# Altium PCB UltraZohm_Digital_Template.PcbDoc
Units mm, origin at the board's own origin, x right, y up, seen from the top; angles counter-clockwise.
Board outline 155.99 x 100 mm, 4 copper layers (Top Layer, Layer 1, Layer 2, Bottom Layer), stack 0.98 mm thick; 57 components, 81 nets, 407 pads, 0 vias.
Unrouted connection lines stored in the file: 311.
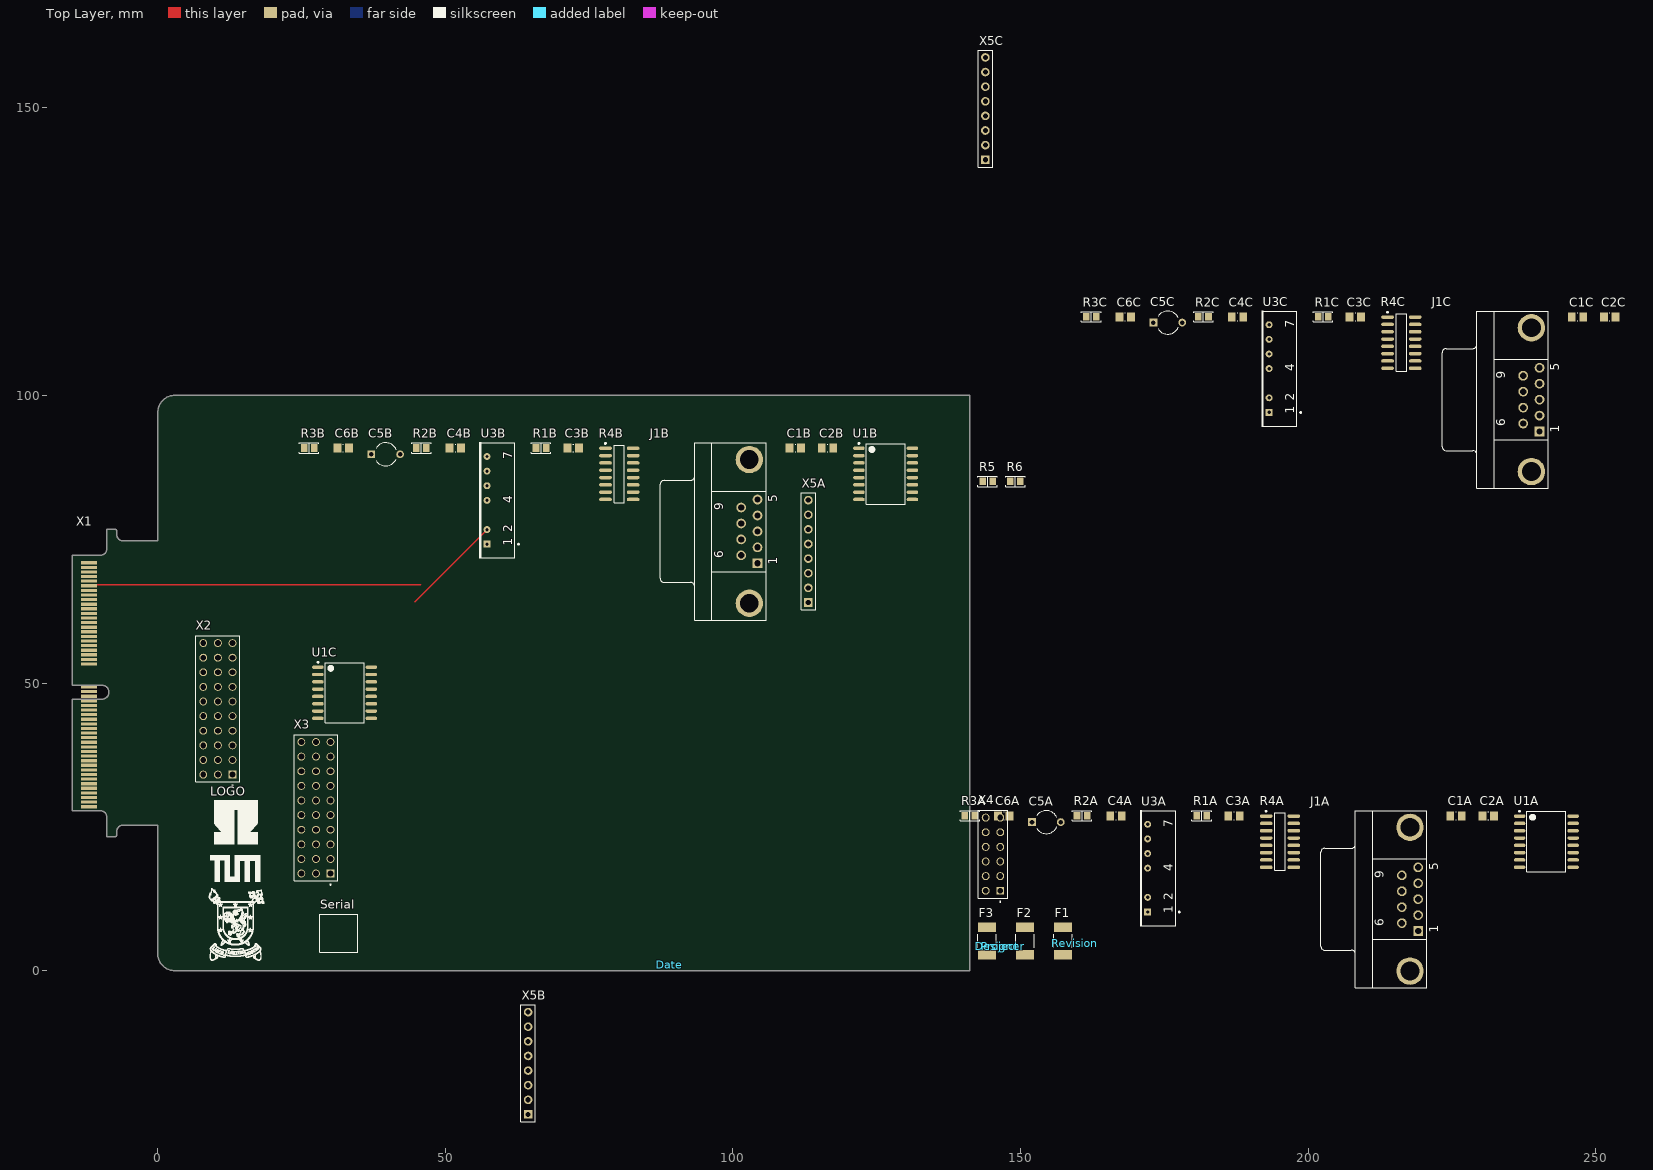
[diagram p0: Top Layer view]
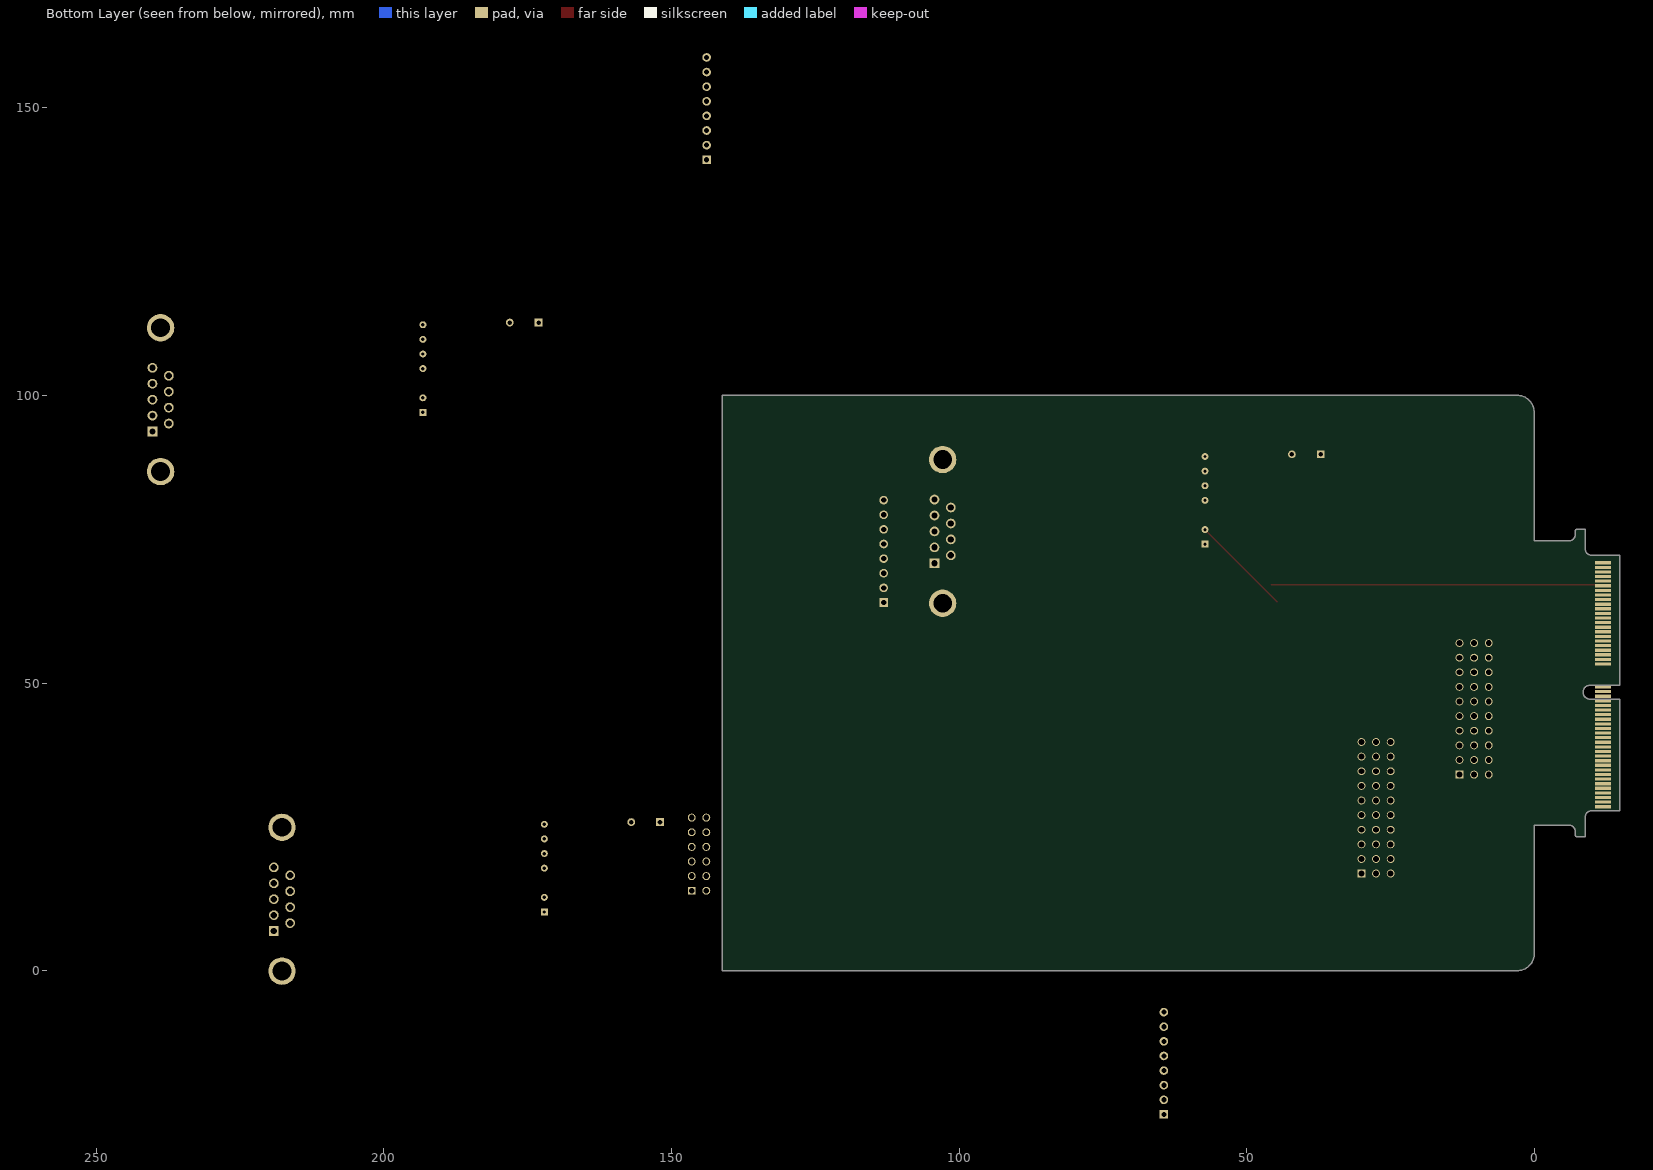
[diagram p1: Bottom Layer view, seen from below]

## Layer stack, top to bottom
Top Solder: solder mask 0.0102, Solder Resist, Dk 3.5
Top Layer: signal copper 0.035
Dielectric 2: prepreg 0.115, FR-4, Dk 4.4
Dielectric 4: prepreg 0.115, FR-4, Dk 4.4
Layer 1: signal copper 0.035
Dielectric 1: core 0.38, Core-036, Dk 4.4
Layer 2: signal copper 0.035
Dielectric 5: prepreg 0.115, FR-4, Dk 4.4
Dielectric 3: prepreg 0.115, FR-4, Dk 4.4
Bottom Layer: signal copper 0.035
Bottom Solder: solder mask 0.0102, Solder Resist, Dk 3.5

## Board outline
-14.853,27.775 -9.853,27.775 cw(c-9.853,26.775) -8.853,26.775 -8.853,23.275 -7.473,23.275 ccw(c-7.473,23.675) -7.073,23.675 -7.073,24.275 cw(c-6.073,24.275) -6.073,25.275 0,25.275 0,3 ccw(c3,3) 3,0 141.141,0 141.141,100 2.99,99.99 ccw(c2.99,97.032) 0.031,97.031 0.031,74.725 -6.073,74.725 cw(c-6.073,75.725) -7.073,75.725 -7.073,76.325 ccw(c-7.473,76.325) -7.473,76.725 -8.853,76.725 -8.853,73.225 cw(c-9.853,73.225) -9.853,72.225 -14.853,72.225 -14.853,49.6 -9.653,49.6 cw(c-9.653,48.4) -9.653,47.2 -14.853,47.2

## Design rules (kind name [scope] priority, off if disabled: settings)
AssemblyTestPointUsage [InNetClass('3V3_SingleEnded') or InNetClass('5V_SingleEnded') or InNetClass('15V_SingleEnded') or InNetClass('DifferentialSignals')] p1:
Clearance Clearance_Differential [InNetClass('DifferentialSignals')] p1: gap=0.1 ignorepadtopadclearanceinfootprint=TRUE except(0: Arc-Hole Track-Hole SMDPad-Hole THPad-Hole Via-Hole Fill-Hole Poly-Hole Region-Hole Text-Hole; 0.3: SMDPad-Via; 0.4: THPad-Via)
Clearance Clearance_Power [InNetClass('Power')] p2: gap=0.1 ignorepadtopadclearanceinfootprint=TRUE except(0: Arc-Hole Track-Hole SMDPad-Hole THPad-Hole Via-Hole Fill-Hole Poly-Hole Region-Hole Text-Hole; 0.15: Via-Poly; 0.2: Track-Poly; 0.25: THPad-Poly; 0.3: Fill-Poly Poly-Region; 0.5: Poly-Poly)
Clearance [All] p3: gap=0.1 ignorepadtopadclearanceinfootprint=TRUE except(0: Arc-Hole Track-Hole SMDPad-Hole THPad-Hole Via-Hole Fill-Hole Poly-Hole Region-Hole Text-Hole; 0.4: SMDPad-Via THPad-Via; 0.5: Poly-Poly)
ComponentClearance [All] p1: gap=0.1 collisioncheckmode=3 verticalgap=0.1 showdistances=FALSE
DiffPairsRouting [InNetClass('DifferentialSignals')] p1: maxlimit=0.25 minlimit=0.127 mostfreqgap=0.25 toplayer_maxgap=0.127 toplayer_prefgap=0.127 toplayer_minwidth=0.285 toplayer_maxwidth=0.285 toplayer_prefwidth=0.285 midlayer1_minwidth=0.069 midlayer1_maxwidth=0.15 midlayer1_prefwidth=0.15 midlayer2_mingap=0.165 midlayer2_minwidth=0.1 midlayer2_maxwidth=0.15 midlayer2_prefwidth=0.15 bottomlayer_maxgap=0.127 bottomlayer_prefgap=0.127 bottomlayer_minwidth=0.285 bottomlayer_maxwidth=0.285 bottomlayer_prefwidth=0.285 impedanceprofiledriven=TRUE impedanceprofileid={5F7DE71B-7B0B-4CDE-8AE7-8AD61221F3A5} impedanceprofilevalue=100.000000 maxuncoupledlength=12.7
FanoutControl Fanout_Power [InNetClass('Power') or InNet('ENABLE')] p1: bgadir=Out bgaviamode=Centered fanoutstyle=Auto fanoutdirection=None viagrid=0.025
FanoutControl Fanout_RS422 [InNetClass('DifferentialSignals')] p2: bgadir=Out bgaviamode=Closest fanoutstyle=Rows fanoutdirection=OutOnly viagrid=0.025
FanoutControl Fanout_BGA [IsBGA] p3 off: bgadir=Out bgaviamode=Centered fanoutstyle=Auto fanoutdirection=Alternating viagrid=0.025 // Fanout_BGA (Default Rule)
FanoutControl Fanout_LCC [IsLCC] p4 off: bgadir=Out bgaviamode=Centered fanoutstyle=Auto fanoutdirection=Alternating viagrid=0.025 // Fanout_LCC (Default Rule)
FanoutControl Fanout_SOIC [IsSOIC] p5 off: bgadir=Out bgaviamode=Centered fanoutstyle=Auto fanoutdirection=Alternating viagrid=0.025 // Fanout_SOIC (Default Rule)
FanoutControl Fanout_Small [(CompPinCount < 5)] p6 off: bgadir=Out bgaviamode=Centered fanoutstyle=Auto fanoutdirection=OutThenIn viagrid=0.025 // Fanout_Small (Default Rule)
FanoutControl Fanout_Default [All] p7: bgadir=NE bgaviamode=Closest fanoutstyle=Rows fanoutdirection=InOnly viagrid=0.025 // Fanout_Default (Default Rule)
Height [All] p1: minheight=0 maxheight=50 prefheight=12.7
HoleSize [All] p1: absolutevalues=TRUE maxlimit=4 minlimit=0.025 maxpercent=80.000 minpercent=20.000
PolygonConnect PolygonConnect_Therm [HoleSize > 2.6] p1: connectstyle=Direct reliefconductorwidth=0.254 reliefentries=4 polygonreliefangle="90 Angle" airgapwidth=0.254
PolygonConnect PolygonConnect_via [InPadClass('pad') or IsVia] p2: connectstyle=Direct reliefconductorwidth=0.254 reliefentries=4 polygonreliefangle="90 Angle" airgapwidth=0.254
PolygonConnect [All] p3: connectstyle=Relief reliefconductorwidth=0.3 reliefentries=4 polygonreliefangle="90 Angle" airgapwidth=0.25
RoomDefinition Encoder [InComponentClass('Encoder')] p1: confinementstyle=ConfineIn formatcopy=TRUE lockcomponents=FALSE outline -46.221,-26.353 4.579,-26.353 4.579,-0.953 -46.221,-0.953
RoomDefinition EN_B [InComponentClass('EN_B')] p2: confinementstyle=ConfineIn formatcopy=TRUE lockcomponents=FALSE outline 24.45,60.645 138.25,60.645 138.25,94.645 24.45,94.645
RoomDefinition EN_A [InComponentClass('EN_A')] p3: confinementstyle=ConfineIn formatcopy=TRUE lockcomponents=FALSE outline 140.8,-26.353 268.3,-26.353 268.3,7.847 140.8,7.847
RoomDefinition EN_C [InComponentClass('EN_C')] p4: confinementstyle=ConfineIn formatcopy=TRUE lockcomponents=FALSE outline 159.7,47.1 287.2,47.1 287.2,81.3 159.7,81.3
RoomDefinition X1 [InComponentClass('X1')] p5: confinementstyle=ConfineIn formatcopy=TRUE lockcomponents=FALSE outline -18.71,21.499 4.15,21.499 4.15,79.665 -18.71,79.665
RoutingLayers RoutingLayers_3V3Signals [InNetClass('3V3_SingleEnded')] p1 off: top layer_v5=TRUE mid layer 1_v5=TRUE mid layer 2_v5=TRUE bottom layer_v5=TRUE
RoutingLayers RoutingLayers_SingleEnded [InNetClass('15V_SingleEnded') or InNetClass('3V3_SingleEnded') or InNetClass('5V_SingleEnded')] p2 off: top layer_v5=TRUE mid layer 1_v5=TRUE mid layer 2_v5=TRUE bottom layer_v5=TRUE
RoutingLayers RoutingLayers_Differential [InNetClass('DifferentialSignals')] p3 off: top layer_v5=TRUE mid layer 1_v5=TRUE mid layer 2_v5=TRUE bottom layer_v5=FALSE
RoutingLayers [All] p4: top layer_v5=TRUE mid layer 1_v5=TRUE mid layer 2_v5=TRUE bottom layer_v5=TRUE
RoutingVias [All] p1: holewidth=0.3 width=0.5 viastyle="Through Hole" minholewidth=0.2 minwidth=0.4 maxholewidth=0.5 maxwidth=1
SolderMaskExpansion [All] p1: expansion=0.102 istentingtop=FALSE
UnRoutedNet UnRoutedNet_Signals [InNetClass('15V_SingleEnded') or InNetClass('3V3_SingleEnded') or InNetClass('5V_SingleEnded') or InNetClass('DifferentialSignals')] p1: checkbadconnections=TRUE
UnRoutedNet [All] p2: checkbadconnections=TRUE
Width Width_Power [InNetClass('Power')] p1: maxlimit=10 minlimit=0.2 preferedwidth=0.3 minimp=50.000000 maximp=50.000000 favimp=50.000000
Width [All] p2: maxlimit=10 minlimit=0.1 preferedwidth=0.3 midlayer1_prefwidth=0.15 midlayer2_prefwidth=0.15 minimp=50.000000 maximp=50.000000 favimp=50.000000
18 further rules are at their usual default settings.

## Classes and differential pairs
net class Encoder_C[1..3]: Encoder_C1 Encoder_C2 Encoder_C3
net class Encoder_B[1..3]: Encoder_B1 Encoder_B2 Encoder_B3
net class Encoder_A[1..3]: Encoder_A1 Encoder_A2 Encoder_A3
component class Encoder: F1 F2 F3 X2 X3 X4
channel class Encoder_1: EN_A EN_B EN_C
component class EN_C: C1C C2C C3C C4C C5C C6C J1C R1C R2C R3C R4C U1C U2_3 U3C X5C
component class EN_B: C1B C2B C3B C4B C5B C6B J1B R1B R2B R3B R4B U1B U2_2 U3B X5B
component class EN_A: C1A C2A C3A C4A C5A C6A J1A R1A R2A R3A R4A U1A U2 U3A X5A
component class X1: R5 R6 X1

## Components (designator, comment, footprint, x,y, rotation, side; value= is the part's Value field where it differs from the comment)
C1A "0.1 µF" C_0805 225.679,26.919 r0 top (schematic designator C1)
C1B "0.1 µF" C_0805 110.85,90.845 r0 top (schematic designator C1)
C1C "0.1 µF" C_0805 246.779,113.647 r0 top (schematic designator C1)
C2A "0.1 µF" C_0805 231.279,26.919 r0 top (schematic designator C2)
C2B "0.1 µF" C_0805 116.45,90.845 r0 top (schematic designator C2)
C2C "0.1 µF" C_0805 252.379,113.647 r0 top (schematic designator C2)
C3A "0.01 µF" C_0805 187.079,26.919 r0 top (schematic designator C3)
C3B "0.01 µF" C_0805 72.25,90.845 r0 top (schematic designator C3)
C3C "0.01 µF" C_0805 208.179,113.647 r0 top (schematic designator C3)
C4A "0.01 µF" C_0805 166.579,26.919 r0 top (schematic designator C4)
C4B "0.01 µF" C_0805 51.75,90.845 r0 top (schematic designator C4)
C4C "0.01 µF" C_0805 187.679,113.647 r0 top (schematic designator C4)
C5A "10 µF" CAPR5-4X5 154.479,25.819 r0 top (schematic designator C5)
C5B "10 µF" CAPR5-4X5 39.65,89.745 r0 top (schematic designator C5)
C5C "10 µF" CAPR5-4X5 175.579,112.647 r0 top (schematic designator C5)
C6A "0.01 µF" C_0805 147.079,26.919 r0 top (schematic designator C6)
C6B "0.01 µF" C_0805 32.25,90.845 r0 top (schematic designator C6)
C6C "0.01 µF" C_0805 168.179,113.647 r0 top (schematic designator C6)
Date "2020/01" Comment 89,1 r0 top
Designer "Michaela Hlatky" Designator:comment 146.479,4.247 r90 top
F1 "Littelfuse_PTC_1812" 1812_PTC_Polyfuse_Littelfuse 157.379,5.147 r90 top value="PTC, 1.1 A, 24V"
F2 "Littelfuse_PTC_1812" 1812_PTC_Polyfuse_Littelfuse 150.779,5.147 r90 top value="PTC, 1.1 A, 24V"
F3 "Littelfuse_PTC_1812" 1812_PTC_Polyfuse_Littelfuse 144.179,5.147 r90 top value="PTC, 1.1 A, 24V"
J1A "DSUB1.385-2H9" DSUB1.385-2H9 208.179,12.419 r90 top (schematic designator J1)
J1B "DSUB1.385-2H9" DSUB1.385-2H9 93.35,76.345 r90 top (schematic designator J1)
J1C "DSUB1.385-2H9" DSUB1.385-2H9 229.279,99.247 r90 top (schematic designator J1)
LOGO "Logo_THN_TUM_USACH" Logo_Partners_1 13.6,25.5 r0 top
Project "UltraZohm_DigitalVoltage" Designator:comment 146.479,4.247 r90 top
R1A "120" "RES 0805_2012" 181.479,26.919 r0 top value=11k8 (schematic designator R1)
R1B "120" "RES 0805_2012" 66.65,90.845 r0 top value=11k8 (schematic designator R1)
R1C "120" "RES 0805_2012" 202.579,113.647 r0 top value=11k8 (schematic designator R1)
R2A "120" "RES 0805_2012" 160.679,26.919 r0 top value=11k8 (schematic designator R2)
R2B "120" "RES 0805_2012" 45.85,90.845 r0 top value=11k8 (schematic designator R2)
R2C "120" "RES 0805_2012" 181.779,113.647 r0 top value=11k8 (schematic designator R2)
R3A "120" "RES 0805_2012" 141.179,26.919 r0 top value=11k8 (schematic designator R3)
R3B "120" "RES 0805_2012" 26.35,90.845 r0 top value=11k8 (schematic designator R3)
R3C "120" "RES 0805_2012" 162.279,113.647 r0 top value=11k8 (schematic designator R3)
R4A "Res Pack3" SO-16_N 195.079,22.419 r0 top value=4.7K (schematic designator R4)
R4B "Res Pack3" SO-16_N 80.25,86.345 r0 top value=4.7K (schematic designator R4)
R4C "Res Pack3" SO-16_N 216.179,109.147 r0 top value=4.7K (schematic designator R4)
R5 "0R" "RES 0805_2012" 144.279,85.047 r0 top
R6 "0R" "RES 0805_2012" 149.079,85.047 r0 top
Revision "1v00" Designator:comment 159.379,4.747 r90 top
Serial "Serial #" SERIAL 30.2,8.6 r0 top
U1A "ISO7230MDW" "TI ISO7230 SOIC" 241.379,22.419 r0 top (schematic designator U1)
U1B "ISO7230MDW" "TI ISO7230 SOIC" 126.55,86.345 r0 top (schematic designator U1)
U1C "ISO7230MDW" "TI ISO7230 SOIC" 32.5,48.3 r0 top (schematic designator U1)
U3A "TMH 0505S" SIL-6(7) 172.079,17.819 r90 top (schematic designator U3)
U3B "TMH 0505S" SIL-6(7) 57.25,81.745 r90 top (schematic designator U3)
U3C "TMH 0505S" SIL-6(7) 193.179,104.647 r90 top (schematic designator U3)
X1 "HSEC8-150-01-XX-DV-A-BL-CARD" HSEC8-150-01-XX-DV-A-BL-CARD -14.3,49.7 r90 top
X2 "Pin Header" SAMTEC_TSW-110-07-F-T 10.481,45.51 r90 top
X3 "Pin Header" SAMTEC_TSW-110-07-F-T 27.521,28.31 r90 top
X4 "Pin Header" SAMTEC_TSW-106-07-F-D 145.2,20.247 r90 top
X5A "Pin Header" HDR1X8 113.1,64 r90 top (schematic designator X5)
X5B "Pin Header" HDR1X8 64.4,-24.983 r90 top (schematic designator X5)
X5C "Pin Header" HDR1X8 143.879,140.947 r90 top (schematic designator X5)

## Footprints (in the part's own frame and the unit in brackets; to place one, negate y for a bottom-side part, rotate by r counter-clockwise, add the part's x,y. Pads: shape width x height; smd on the part's side, far side on the other; paste and mask are expansions set on the pad)
1812_PTC_Polyfuse_Littelfuse [mm] "Chip Fuse, 2-Leads, Body 4.6x3.24mm"
  rect 1.68x3.14 smd: 1(-2.39,0) 2(2.39,0)
  silkscreen extent -1.15,-1.62 1.15,1.62, body extent -2.3,-1.62 2.3,1.62, height 1.15
C_0805 [mm] "Chip Capacitor, Body 2.0x1.2mm, Height 1.45mm, IPC Low Density"
  rect 1.35x1.55 smd: 1(-1,0) 2(1,0)
  silkscreen extent -0.05,-0.67 0.05,0.67, body extent -1.1,-0.72 1.1,0.72, height 1.45
CAPR5-4X5 [mm] "Capacitor; 2 Leads"
  rect 1.35x1.35 hole 0.8: 1(-2.5,0)
  round 1.35 hole 0.8: 2(2.5,0)
  silkscreen extent -1.69,-2 1.82,2
Comment [mm] "Displays only the comment of the PCB component"
Designator:comment [mm] "prints out designator and comment of a component"
DSUB1.385-2H9 [mm] "Connector; D Subminiature; 9 Position; Right Angle; Pitch 1.385 mm"
  rect 1.69x1.69 hole 1.09: 1(-5.54,-10.92)
  round 1.69 hole 1.09: 2(-2.77,-10.92) 3(0,-10.92) 4(2.77,-10.92) 5(5.54,-10.92) 6(-4.155,-8.08) 7(-1.385,-8.08) 8(1.385,-8.08) 9(4.155,-8.08)
  round 4.76 hole 3.26: 10(-12.495,-9.5) 11(12.495,-9.5)
  silkscreen extent -15.4,-12.4 15.4,6, body extent -15.43,-12.66 15.37,8.09, height 12.6
HDR1X8 [mm] "Connector; Header; 8 Position"
  rect 1.5x1.5 hole 0.9: 1(0,0)
  round 1.5 hole 0.9: 2(2.54,0) 3(5.08,0) 4(7.62,0) 5(10.16,0) 6(12.7,0) 7(15.24,0) 8(17.78,0)
  silkscreen extent -1.27,-1.27 19.05,1.27
HSEC8-150-01-XX-DV-A-BL-CARD [mm]
  rect 0.55x2.8 smd far side paste-0.381 mask+0: 1(-21.2,-2.4) 3(-20.4,-2.4) 5(-19.6,-2.4) 7(-18.8,-2.4) 9(-18,-2.4) 11(-17.2,-2.4) 13(-16.4,-2.4) 15(-15.6,-2.4) 17(-14.8,-2.4) 19(-14,-2.4) 21(-13.2,-2.4) 23(-12.4,-2.4) 25(-11.6,-2.4) 27(-10.8,-2.4) 29(-10,-2.4) 31(-9.2,-2.4) 33(-8.4,-2.4) 35(-7.6,-2.4) 37(-6.8,-2.4) 39(-6,-2.4) 41(-5.2,-2.4) 43(-4.4,-2.4) 45(-3.6,-2.4) 47(-2.8,-2.4) 49(-2,-2.4) 51(-1.2,-2.4) 53(-0.4,-2.4) 55(3.6,-2.4) 57(4.4,-2.4) 59(5.2,-2.4) 61(6,-2.4) 63(6.8,-2.4) 65(7.6,-2.4) 67(8.4,-2.4) 69(9.2,-2.4) 71(10,-2.4) 73(10.8,-2.4) 75(11.6,-2.4) 77(12.4,-2.4) 79(13.2,-2.4) 81(14,-2.4) 83(14.8,-2.4) 85(15.6,-2.4) 87(16.4,-2.4) 89(17.2,-2.4) 91(18,-2.4) 93(18.8,-2.4) 95(19.6,-2.4) 97(20.4,-2.4) 99(21.2,-2.4)
  rect 0.55x2.8 smd paste-0.381 mask+0: 2(-21.2,-2.4) 4(-20.4,-2.4) 6(-19.6,-2.4) 8(-18.8,-2.4) 10(-18,-2.4) 12(-17.2,-2.4) 14(-16.4,-2.4) 16(-15.6,-2.4) 18(-14.8,-2.4) 20(-14,-2.4) 22(-13.2,-2.4) 24(-12.4,-2.4) 26(-11.6,-2.4) 28(-10.8,-2.4) 30(-10,-2.4) 32(-9.2,-2.4) 34(-8.4,-2.4) 36(-7.6,-2.4) 38(-6.8,-2.4) 40(-6,-2.4) 42(-5.2,-2.4) 44(-4.4,-2.4) 46(-3.6,-2.4) 48(-2.8,-2.4) 50(-2,-2.4) 52(-1.2,-2.4) 54(-0.4,-2.4) 56(3.6,-2.4) 58(4.4,-2.4) 60(5.2,-2.4) 62(6,-2.4) 64(6.8,-2.4) 66(7.6,-2.4) 68(8.4,-2.4) 70(9.2,-2.4) 72(10,-2.4) 74(10.8,-2.4) 76(11.6,-2.4) 78(12.4,-2.4) 80(13.2,-2.4) 82(14,-2.4) 84(14.8,-2.4) 86(15.6,-2.4) 88(16.4,-2.4) 90(17.2,-2.4) 92(18,-2.4) 94(18.8,-2.4) 96(19.6,-2.4) 98(20.4,-2.4) 100(21.2,-2.4)
Logo_Partners_1 [mm] "THN, TUM and USACH Logo"
  silkscreen extent -4.69,-23.68 4.93,4.11
"RES 0805_2012" [mm] "Chip Resistor, 2-Leads, Body 2.00x1.25mm, IPC Medium Density"
  rect 1.15x1.35 smd: 1(-0.875,0) 2(0.875,0)
  silkscreen extent -1.7,-0.9 1.7,0.9, body extent -1,-0.62 1,0.63, height 0.6
SAMTEC_TSW-106-07-F-D [mm]
  rect 1.37x1.37 hole 1.02: 01(-6.35,-1.27)
  round 1.37 hole 1.02: 02(-6.35,1.27) 03(-3.81,-1.27) 04(-3.81,1.27) 05(-1.27,-1.27) 06(-1.27,1.27) 07(1.27,-1.27) 08(1.27,1.27) 09(3.81,-1.27) 10(3.81,1.27) 11(6.35,-1.27) 12(6.35,1.27)
  silkscreen extent -8.37,-2.54 7.62,2.54
SAMTEC_TSW-110-07-F-T [mm]
  rect 1.37x1.37 hole 1.02: 01(-11.43,-2.54)
  round 1.37 hole 1.02: 02(-11.43,0) 03(-11.43,2.54) 04(-8.89,-2.54) 05(-8.89,0) 06(-8.89,2.54) 07(-6.35,-2.54) 08(-6.35,0) 09(-6.35,2.54) 10(-3.81,-2.54) 11(-3.81,0) 12(-3.81,2.54) 13(-1.27,-2.54) 14(-1.27,0) 15(-1.27,2.54) 16(1.27,-2.54) 17(1.27,0) 18(1.27,2.54) 19(3.81,-2.54) 20(3.81,0) 21(3.81,2.54) 22(6.35,-2.54) 23(6.35,0) 24(6.35,2.54) 25(8.89,-2.54) 26(8.89,0) 27(8.89,2.54) 28(11.43,-2.54) 29(11.43,0) 30(11.43,2.54)
  silkscreen extent -13.45,-3.81 12.7,3.81
SERIAL [mm]
  silkscreen extent -2,-5.4 4.6,1.2
SIL-6(7) [mm] "SIP; 7 Leads (1 Absent); Body 19.5 x 6 mm (LxW typ); Pitch 2.54 mm"
  rect 1.2x1.2 hole 0.6: 1(-7.62,0)
  round 1.2 hole 0.6: 2(-5.08,0) 4(0,0) 5(2.54,0) 6(5.08,0) 7(7.62,0)
  silkscreen extent -10.1,-5.63 10.1,1.35, body extent -10.13,-6.47 9.37,1.13, height 10.5
SO-16_N [mm] "SOIC, 16-Leads, Body 9.9x3.9mm, Pitch 1.27mm, IPC Medium Density"
  oval 2.2x0.6 smd: 1(-2.4,4.445) 2(-2.4,3.175) 3(-2.4,1.905) 4(-2.4,0.635) 5(-2.4,-0.635) 6(-2.4,-1.905) 7(-2.4,-3.175) 8(-2.4,-4.445) 9(2.4,-4.445) 10(2.4,-3.175) 11(2.4,-1.905) 12(2.4,-0.635) 13(2.4,0.635) 14(2.4,1.905) 15(2.4,3.175) 16(2.4,4.445)
  silkscreen extent -2.52,-5 0.9,5.42, body extent -2,-5 2,5, height 1.75
"TI ISO7230 SOIC" [mm] "SOIC, 16-Leads, Body 10,30x7,50mm, Pitch 1,27mm, IPC Medium Density"
  oval 2x0.6 smd: 1(-4.65,4.445) 2(-4.65,3.175) 3(-4.65,1.905) 4(-4.65,0.635) 5(-4.65,-0.635) 6(-4.65,-1.905) 7(-4.65,-3.175) 8(-4.65,-4.445) 9(4.65,-4.445) 10(4.65,-3.175) 11(4.65,-1.905) 12(4.65,-0.635) 13(4.65,0.635) 14(4.65,1.905) 15(4.65,3.175) 16(4.65,4.445)
  silkscreen extent -4.77,-5.25 3.4,5.42, body extent -3.8,-5.25 3.8,5.25, height 2.65

## Part data
C1A C1B C1C C2A C2B C2C: library part C0805C104J5RECTU, "Capacitor 0805, 50 VDC, 0.1 µF, X7R", Device Package=0805, Manufacturer=KEMET, Operating Temperature="-55 - 125°C", Supplier Part Number 1=80-C0805C104J5RECTU, Tolerance="5 %", Voltage Rating="50 VDC", Component Type="Capacitor 0805", ComponentLink1Description=Datasheet, ComponentLink1URL=https://www.mouser.de/datasheet/2/212/KEM_C1002_X7R_SMD-1102033.pdf, Created from=MGremer, Created On="20.12.2020 13:54:13", Last Updated="20.12.2020 16:34:30", Live Cycle Status=1, Manufacturer Part Number=C0805C104J5RECTU, Mounting Type=SMD, PartID=17, Series="SMD Comm X7R", Stock number="Labor SMD Container", Supplier 1=Mouser, Type=Capacitor
C3A C3B C3C C4A C4B C4C C6A C6B C6C: library part GRM21BR72A103KA01L, "Capacitor 0805, 100 VDC, 0.01 µF, X7R", Device Package=0805, Manufacturer="Murata Electronics", Operating Temperature="-55 - 125°C", Supplier Part Number 1=81-GRM21BR72A103K, Tolerance="10 %", Voltage Rating="100 VDC", Component Type="Capacitor 0805", ComponentLink1Description=Datasheet, ComponentLink1URL=https://www.mouser.de/datasheet/2/281/1/GRM21BR72A103KA01_01C-1986947.pdf, Created from=MGremer, Created On="20.12.2020 13:54:13", Last Updated="17.11.2021 11:27:00", Live Cycle Status=1, Manufacturer Part Number=GRM21BR72A103KA01L, Mounting Type=SMD, PartID=86, Series=GRM, Stock number="not stored", Supplier 1=Mouser, Type=Capacitor
C5A C5B C5C: library part CAPR5-4X5, "Capacitor; 2 Leads", Component Type=Capacitor, ComponentLink1Description=Datasheet, Created from=MHlatky, Created On="25.05.2021 10:46:00", Last Updated="30.11.2021 13:37:41", Live Cycle Status=1, Manufacturer Part Number=CAPR5-4X5, PackageDescription="Capacitor; 2 Leads", PackageReference=CAPR5-4X5, PartID=5, Published=23-Sep-2002, Publisher="Altium Limited", Supplier Part Number 1=CAPR5-4X5, Type=Capacitor
Date: library part ProjectDate, "Year and month of the design finish", Created=2020-01-08_Thilo_Wendt
Designer: library part ProjectAuthor, Created=2020-01-08_Thilo_Wendt
F1 F2 F3: "POLYSWITCH RESETTABLE DEVICES", Hold Current=1.1A, Manufacturer=Littelfuse, MPN=miniASMDC110F/24, Nominal current="1 A", Operating Temperature="-40 - 85 °C", Package=1812, Resistance="0.18 Ohm", Trip Current=2.2A, Voltage=24V, Component Type=Littelfuse_PTC_1812, ComponentLink1Description=Datasheet, ComponentLink1URL=https://www.littelfuse.com/~/media/electronics/datasheets/resettable_ptcs/littelfuse_ptc_surface_mount_catalog_datasheet.pdf.pdf, Created=2019_02_10_AGeiger, Created from=MHlatky, Created On="07.05.2021 06:50:33", Last Updated="20.12.2021 12:44:16", Live Cycle Status=1, Manufacturer Part Number=Littelfuse_PTC_1812, MF=Littelfuse, Mounting Type=SMD, PartID=5, Type=Fuse
J1A J1B J1C: "Connector; D Subminiature; 9 Position; Right Angle; Pitch 1.385 mm", Device Package=-, Manufacturer=Altium, PackageDocument=O, Component Type="DSUB Connector", ComponentLink1Description=Datasheet, ComponentLink1URL=[NULL], Created from=MHlatky, Created On="26.01.2021 09:19:51", DatasheetDocument=1-Sep-1999, Gender=Receptacle, Last Updated="20.12.2021 09:43:18", LatestRevisionDate=17-Jul-2002, LatestRevisionNote="Re-released for DXP Platform.", Live Cycle Status=1, Manufacturer Part Number=DSUB1.385-2H9, Orientation="Right Angle", PackageReference=788750, PartID=15, Positions=9, Published=15-Jun-2001, Publisher="Altium Limited", Stock number="not stored", Type="DSUB Connector"
LOGO: "Logo of THN TUM USACH", Created=2020-01-08_Thilo_Wendt
Project: library part ProjectName, Created=2020-01-08_Thilo_Wendt
R1A R1B R1C R2A R2B R2C R3A R3B R3C: library part ERJ-6ENF1182V, "SMD resistor 1%", Device Package=0805, Manufacturer=Panasonic, Supplier Part Number 1=667-ERJ-6ENF1182V, Tolerance=1%, Component Type="SMD resistor", ComponentLink1Description=Datasheet, ComponentLink1URL=https://www.mouser.de/datasheet/2/315/AOA0000C304-1149620.pdf, Created from=MGremer, Created On="14.12.2020 16:17:14", Last Updated="14.12.2020 18:22:52", Live Cycle Status=1, Manufacturer Part Number=ERJ-6ENF1182V, Mounting Type=SMD, PartID=148, Stock number="not stored", Supplier 1=Mouser, Type=Resistor
R4A R4B R4C: "SOIC, 16-Leads, Body 9.9x3.9mm, Pitch 1.27mm, IPC Medium Density", Device Package=SOIC, Code_IPC=SOIC127P600-16, Code_JEDEC=MS-012-AC, Component Type="Res Pack3", ComponentLink1Description=Datasheet, Created from=MHlatky, Created On="14.12.2020 16:17:14", Last Updated="20.12.2021 09:54:47", LatestRevisionDate=29-May-2009, LatestRevisionNote="IPC-7351 Footprint Added.", Live Cycle Status=1, Manufacturer Part Number="Res Pack3", Mounting Type=SMD, PackageDescription="16-Pin Small Outline Integrated Circuit 1.27 mm Pitch", PackageReference=SO-16, PartID=207, Published=24-Mar-1999, Publisher="Altium Limited", Supplier 1=Altium, Type=Resistor
R5 R6: library part RC0805JR-100RL, "SMD resistor 5%", Device Package=0805, Manufacturer=Yageo, Supplier Part Number 1=603-RC0805JR-100RL, Tolerance=5%, Component Type="SMD resistor", ComponentLink1Description=Datasheet, ComponentLink1URL=https://www.mouser.com/catalog/specsheets/Yageo-03-18-2021-PYu-RC_Group_51_RoHS_L_11.pdf, Created from=MGremer, Created On="14.12.2020 16:17:14", Last Updated="14.12.2020 18:22:52", Live Cycle Status=1, Manufacturer Part Number=RC0805JR-100RL, Mounting Type=SMD, PartID=186, Stock number="not stored", Supplier 1=Mouser, Type=Resistor
Revision: library part ProjectRevision, Created=2020-01-08_Thilo_Wendt
Serial: library part SerialNumber, "Empty serial number of the PCB. Can be used for manually writing the serial number"
U1A U1B U1C: "ISO723xx High-Speed, Triple-Channel Digital Isolators", Manufacturer="Analog Devices", Operating Temperature="-40 - +125 °C", Supplier Part Number 1=595-ISO7230MDW, Component Type=Microcontroller, ComponentLink1Description=Datasheet, ComponentLink1URL=https://www.ti.com/lit/ds/symlink/iso7230m.pdf?HQS=dis-mous-null-mousermode-dsf-pf-null-wwe&ts=1639988443497&ref_url=https%253A%252F%252Fwww.mouser.de%252F, Created from=MHlatky, Created On="26.01.2021 09:03:43", Last Updated="17.06.2021 08:32:47", Live Cycle Status=1, Manufacturer Part Number=ISO7230MDW, Mounting Type=SOIC, PartID=5, Stock number="not stored", Supplier 1=Mouser, Type=Microcontroller
U3A U3B U3C: "ISOLIERTE DC-DC-WANDLER Product Type: DC/DC; Package Style: SIP; Output Power (W): 2; Input Voltage: 5 VDC +/-10%; Output 1 (Vdc): 5; Output 2 (Vdc): N/A; Output 3 (Vdc): N/A", Device Package=SIP, Manufacturer=Traco, Operating Temperature="-40 - 85 °C", Supplier Part Number 1=495-TMH-0505S, Component Type="DC-DC Converter", ComponentLink1Description=Datasheet, ComponentLink1URL=https://www.tracopower.com/products/tmh.pdf, Created from=MHlatky, Created On="16.11.2021 07:44:11", Last Updated="16.11.2021 07:44:11", Live Cycle Status=1, Manufacturer Part Number="TMH 0505S", Mounting Type=SMD, PartID=20, Series=TMH, Stock number="not stored", Supplier 1=Mouser, Type="isolated DC-DC Converter"
X1: "Mating Card Layout for HSEC8-150-01-XX-DV-A-BL", Device Package="PCB Shape", Manufacturer=SAMTEC, Supplier Part Number 1=NA, Category=SAMTEC, Component Type="Board to Board Connector", ComponentLink1Description=Homepage, ComponentLink1URL=https://www.samtec.com/products/hsec8-dp, Created=2018_04_23_AGeiger, Created from="T. Wendt", Created On="26.02.2021 16:36:12", Last Updated="26.02.2021 16:37:20", Live Cycle Status=1, Manufacturer Part Number=HSEC8-150-01-XX-DV-A-BL-CARD, Mounting Type="PCB Shape", Number of positions=100, Number of rows=2, PartID=2, Series=HSEC8, Stock number="not stored", Supplier 1=SAMTEC, Type="Board to Board Connector"
X2 X3: library part TSW-110-07-F-T, "THROUGH-HOLE .025\" SQ POST HEADER", Device Package=THT, Manufacturer=SAMTEC, Operating Temperature="-55 +125 °C", Package=None, Supplier Part Number 1=200-TSW11007FT, Availability=Unavailable, Component Type="Pin Header", ComponentLink1Description=Datasheet, ComponentLink1URL=https://www.mouser.de/datasheet/2/527/tsw_th-2854687.pdf, Created from=MHlatky, Created On="22.11.2021 15:31:45", Last Updated="20.12.2021 07:38:08", Live Cycle Status=1, Manufacturer Part Number=TSW-110-07-F-T, MF="Samtec Inc.", Mounting Type=THT, MP=TSW-110-07-F-T, PartID=7, Price=None, Series=TSW, Stock number="not stored", Supplier 1=Mouser, Type="Pin Header"
X4: library part TSW-106-07-F-D, "THROUGH-HOLE .025\" SQ POST HEADER", Device Package=THT, Manufacturer=SAMTEC, Operating Temperature="-55 +125 °C", Package=None, Supplier Part Number 1=200-TSW10607FD, Availability=Unavailable, Component Type="Pin Header", ComponentLink1Description=Datasheet, ComponentLink1URL=https://www.mouser.de/datasheet/2/527/tsw_th-2854687.pdf, Created from=MHlatky, Created On="22.11.2021 15:31:45", Last Updated="20.12.2021 07:38:08", Live Cycle Status=1, Manufacturer Part Number=TSW-106-07-F-D, MF=Samtec, Mounting Type=THT, MP=TSW-106-07-F-D, PartID=8, Price=None, Series=TSW, Stock number="not stored", Supplier 1=Mouser, Type="Pin Header"
X5A X5B X5C: library part HDR1X8, "8 Pin", Component Type="Pin Header", ComponentLink1Description=Datasheet, Created from=MHlatky, Created On="22.11.2021 15:31:45", Last Updated="20.12.2021 07:38:08", Live Cycle Status=1, Manufacturer Part Number=HDR1X8, PartID=9, Stock number="not stored", Supplier 1=Altium, Supplier Part Number 1=HDR1X8, Type="Pin Header"

## Nets (pads, with @x,y where several pads share a name; then routed paths per layer and width w, separated by ;. In a path a pad name is that pad's centre, name@x,y a point inside that pad or via, vN(x,y) a via of type N, cw(c..) or ccw(c..) an arc to the next point about the centre after c; other vN are vias at no path point)
3V3_PER: F3.1 X1.13 X1.14
3V3_PER_fused: F3.2 X4.09 X4.10
5V_PER: F2.1 X1.9 X1.10
5V_PER_fused: F2.2 X4.05 X4.06
+3V3: C2A.2 C2B.2 C2C.2 U1A.10 U1A.16 U1B.10 U1B.16 U1C.10 U1C.16
+5: U3A.1 U3B.1 U3C.1
Collective_FLT: X1.96
CPLD_DigIn_01: X1.83
CPLD_DigIn_02: X1.85
CPLD_DigOut_01: X1.84
CPLD_DigOut_02: X1.86
DIG_IO_01: X1.17 X2.01
DIG_IO_02: X1.18 X2.02
DIG_IO_03: X1.21 X2.04
DIG_IO_04: X1.22 X2.05
DIG_IO_05: X1.25 X2.07
DIG_IO_06: X1.26 X2.08
DIG_IO_07: X1.29 X2.10
DIG_IO_08: X1.30 X2.11
DIG_IO_09: X1.33 X2.13
DIG_IO_10: X1.34 X2.14
DIG_IO_11: X1.37 X2.16
DIG_IO_21: X1.57 X3.01
DIG_IO_22: X1.58 X3.02
DIG_IO_23: X1.61 X3.04
DIG_IO_24: X1.62 X3.05
DIG_IO_25: X1.65 X3.07
DIG_IO_26: X1.66 X3.08
DIG_IO_27: X1.69 X3.10
DIG_IO_28: X1.70 X3.11
DIG_IO_29: X1.73 X3.13
DIG_IO_30: X1.74 X3.14
DIG_Res_01: X1.79
DIG_Res_02: X1.80
DIG_Res_03: X1.91
DIG_Res_04: X1.92
DIG_Res_05: X1.93
DIG_Res_06: X1.94
DIG_Res_07: X1.95
Encoder_A1: U1A.14 X1.42 X2.20
Encoder_A2: U1B.14 X1.41 X2.19
Encoder_A3: U1C.14 X1.38 X2.17
Encoder_B1: U1A.13 X1.49 X2.25
Encoder_B2: U1B.13 X1.46 X2.23
Encoder_B3: U1C.13 X1.45 X2.22
Encoder_C1: U1A.12 X1.54 X2.29
Encoder_C2: U1B.12 X1.53 X2.28
Encoder_C3: U1C.12 X1.50 X2.26
GND: C2A.1 C2B.1 C2C.1 R5.1 U1A.9 U1A.15 U1B.9 U1B.15 U1C.9 U1C.15 U3A.2 U3B.2 U3C.2 X1.1 X1.2 X1.3 X1.4 X1.7 X1.8 X1.11 X1.12 X1.15 X1.16 X1.19 X1.20 X1.23 X1.24 X1.27 X1.28 X1.31 X1.32 X1.35 X1.36 X1.39 X1.40 X1.43 X1.44 X1.47 X1.48 X1.51 X1.52 X1.55 X1.56 X1.59 X1.60 X1.63 X1.64 X1.67 X1.68 X1.71 X1.72 X1.75 X1.76 X1.81 X1.82 X1.87 X1.88 X1.97 X1.98 X2.03 X2.06 X2.09 X2.12 X2.15 X2.18 X2.21 X2.24 X2.27 X2.30 X3.03 X3.06 X4.03 X4.04 X4.07 X4.08 X4.11 X4.12 | length 75.5
  Top Layer w0.3: -12.1,67.1 45.68,67.1 ; 44.73,64.145 U3B.2
GND_ENC: C1A.1 C1B.1 C1C.1 C5A.2 C5B.2 C5C.2 J1A.1 J1B.1 J1C.1 U1A.2 U1A.8 U1B.2 U1B.8 U1C.2 U1C.8 U3A.4 U3B.4 U3C.4 X5A.8 X5B.8 X5C.8
I2C0_SCA: X1.90
I2C0_SCL: X1.89
I2C0_SDA: X3.26
NetC3A_1: C3A.1 R1A.2
NetC3B_1: C3B.1 R1B.2
NetC3C_1: C3C.1 R1C.2
NetC4A_1: C4A.1 R2A.2
NetC4B_1: C4B.1 R2B.2
NetC4C_1: C4C.1 R2C.2
NetC6A_1: C6A.1 R3A.2
NetC6B_1: C6B.1 R3B.2
NetC6C_1: C6C.1 R3C.2
PILOT_IN: R6.2 X1.100
PILOT_OUT: R5.2 R6.1 X1.99
PS_DIG_GPIO_01: X1.77
PS_DIG_GPIO_02: X1.78
"U0 SingleA": U1A.5
"U0 SingleB": U1B.5
"U0 SingleC": U1C.5
U0+A: C3A.2 C4A.2 C6A.2 J1A.3 J1A.4 J1A.5 J1A.7 J1A.8 J1A.9 R1A.1 R2A.1 R3A.1 R4A.1 R4A.2 R4A.3 R4A.4 R4A.5 R4A.6 X5A.1 X5A.2 X5A.3 X5A.4 X5A.5 X5A.6
U0+B: C3B.2 C4B.2 C6B.2 J1B.3 J1B.4 J1B.5 J1B.7 J1B.8 J1B.9 R1B.1 R2B.1 R3B.1 R4B.1 R4B.2 R4B.3 R4B.4 R4B.5 R4B.6 X5B.1 X5B.2 X5B.3 X5B.4 X5B.5 X5B.6
U0+C: C3C.2 C4C.2 C6C.2 J1C.3 J1C.4 J1C.5 J1C.7 J1C.8 J1C.9 R1C.1 R2C.1 R3C.1 R4C.1 R4C.2 R4C.3 R4C.4 R4C.5 R4C.6 X5C.1 X5C.2 X5C.3 X5C.4 X5C.5 X5C.6
"U1 SingleA": U1A.4
"U1 SingleB": U1B.4
"U1 SingleC": U1C.4
"U2 SingleA": U1A.3
"U2 SingleB": U1B.3
"U2 SingleC": U1C.3
VCC_ENC: C1A.2 C1B.2 C1C.2 C5A.1 C5B.1 C5C.1 J1A.2 J1B.2 J1C.2 R4A.9 R4A.10 R4A.11 R4A.12 R4A.13 R4A.14 R4A.15 R4A.16 R4B.9 R4B.10 R4B.11 R4B.12 R4B.13 R4B.14 R4B.15 R4B.16 R4C.9 R4C.10 R4C.11 R4C.12 R4C.13 R4C.14 R4C.15 R4C.16 U1A.1 U1B.1 U1C.1 U3A.6 U3B.6 U3C.6 X5A.7 X5B.7 X5C.7
VIN: F1.1 X1.5 X1.6
VIN_fused: F1.2 X4.01 X4.02
pads on no net: J1A.6 J1A.10 J1A.11 J1B.6 J1B.10 J1B.11 J1C.6 J1C.10 J1C.11 R4A.7 R4A.8 R4B.7 R4B.8 R4C.7 R4C.8 U1A.6 U1A.7 U1A.11 U1B.6 U1B.7 U1B.11 U1C.6 U1C.7 U1C.11 U3A.5 U3A.7 U3B.5 U3B.7 U3C.5 U3C.7 X3.09 X3.12 X3.15 X3.16 X3.17 X3.18 X3.19 X3.20 X3.21 X3.22 X3.23 X3.24 X3.25 X3.27 X3.28 X3.29 X3.30

## Silkscreen, mask and mechanical layers (free items; w line width, h text height)
Mechanical 1:
  lines w0.254: -9.513,27.684 cw(c-9.513,26.684) -8.513,26.684 ; -9.513,72.134 ccw(c-9.513,73.134) -8.513,73.134 ; -9.3,47.1 ccw(c-9.3,48.3) -9.3,49.5 ; -7.133,23.184 ccw(c-7.133,23.584) -6.733,23.584 ; -7.133,76.634 cw(c-7.133,76.234) -6.733,76.234 ; -6.733,24.184 cw(c-5.733,24.184) -5.733,25.184 ; -6.733,75.634 ccw(c-5.733,75.634) -5.733,74.634 ; 0,2.9 ccw(c2.9,2.9) 2.9,0 ; 0.031,97.1 cw(c2.966,97.066) 3,100

## Dimensions
141.141,0 to 141.141,100 on Mechanical 2
146.143,97.802 to -14.84,72.216 on Mechanical 2
141.141,100 to -14.853,72.225 on Mechanical 2
141.141,100 to 0.031,100 on Mechanical 2

## Text inside footprints (layer, text, board x,y; h text height)
J1A: Top Overlay "1" at 222.554,6.629 h1.5 r90; Top Overlay "5" at 222.554,17.459 h1.5 r90; Top Overlay "9" at 213.154,16.074 h1.5 r90; Top Overlay "6" at 213.154,7.764 h1.5 r90
J1B: Top Overlay "1" at 107.725,70.555 h1.5 r90; Top Overlay "5" at 107.725,81.385 h1.5 r90; Top Overlay "9" at 98.325,80 h1.5 r90; Top Overlay "6" at 98.325,71.69 h1.5 r90
J1C: Top Overlay "1" at 243.654,93.457 h1.5 r90; Top Overlay "5" at 243.654,104.287 h1.5 r90; Top Overlay "9" at 234.254,102.902 h1.5 r90; Top Overlay "6" at 234.254,94.592 h1.5 r90
Serial: Mechanical 5 "SerialNr" at 34,4.8 h0.7 r180
U3A: Top Overlay "1" at 176.454,9.949 h1.5 r90; Top Overlay "7" at 176.454,24.939 h1.5 r90; Top Overlay "4" at 176.454,17.319 h1.5 r90; Top Overlay "2" at 176.454,12.239 h1.5 r90
U3B: Top Overlay "1" at 61.625,73.875 h1.5 r90; Top Overlay "7" at 61.625,88.865 h1.5 r90; Top Overlay "4" at 61.625,81.245 h1.5 r90; Top Overlay "2" at 61.625,76.165 h1.5 r90
U3C: Top Overlay "1" at 197.554,96.777 h1.5 r90; Top Overlay "7" at 197.554,111.767 h1.5 r90; Top Overlay "4" at 197.554,104.147 h1.5 r90; Top Overlay "2" at 197.554,99.067 h1.5 r90